# EAGLE board Active_Bandpass_Filter_filter (EAGLE 7.5.0)
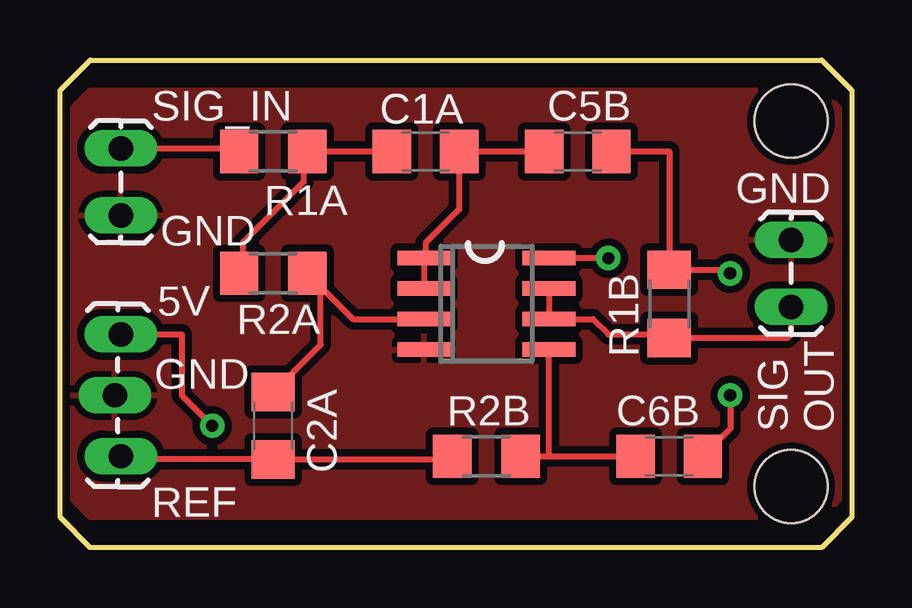
[diagram p0: board, top side]
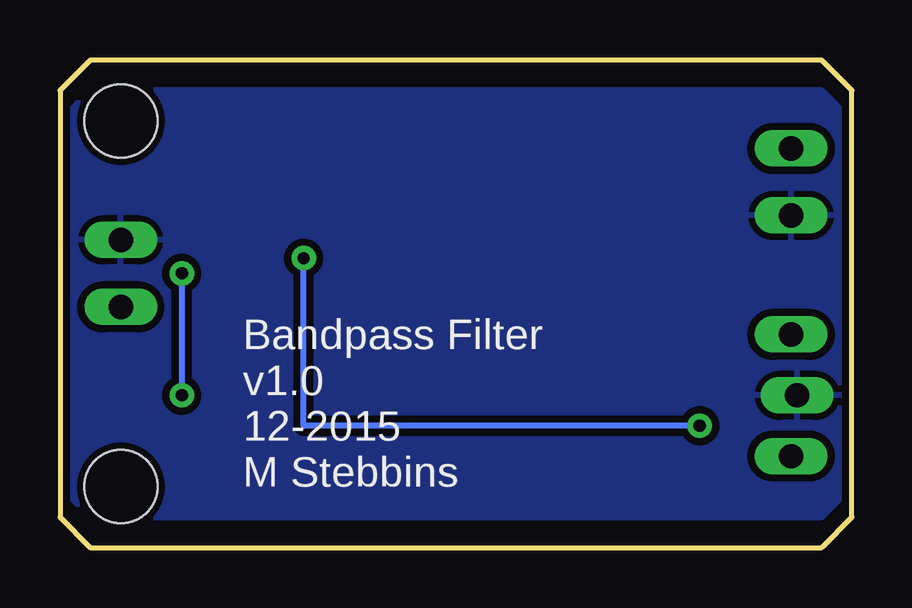
[diagram p1: board, bottom side, seen from below]

Size 33.02 x 20.32 mm. Coordinates in mm from the lower left corner, seen from the top.
Outline: 0,1.27 0,19.05 1.27,20.32 31.75,20.32 33.02,19.05 33.02,1.27 31.75,0 1.27,0 0,1.27
Copper layers (1*16): Top 0.035mm / dielectric 1.5mm / Bottom 0.035mm
Design rules "SparkFun-2-layer-STANDARD": minimum track width 10mil, minimum drill 20mil, track to track 10mil, track to pad 8mil, pad to pad 8mil, via to via 10mil, smd to smd 8mil, copper to edge 8mil, drill to drill 8mil, minimum pad ring 10mil, minimum via ring 10mil, stop-mask expansion 4mil, vias tented up to drill 20mil, thermal gap 10mil
Holes 3.05 mm at 30.48,17.78 30.48,2.54

## Footprints (pad centres in the part's own frame; a part is rotated, then mirrored left to right if it is on the bottom)
C1206 = smd 1.6 x 1.8: 1 -1.4,0; 2 1.4,0
SO8 = smd 0.6 x 2.2: 1 -1.905,-2.6; 2 -0.635,-2.6; 3 0.635,-2.6; 4 1.905,-2.6; 5 1.905,2.6; 6 0.635,2.6; 7 -0.635,2.6; 8 -1.905,2.6
1X02_LOCK_LONGPADS = drill 1.016 long: 1 -0.127,0; 2 2.667,0
1X03_LOCK_LONGPADS = drill 1.016 long: 1 0,0; 2 2.54,-0.254; 3 5.08,0
R1206 = smd 1.6 x 1.803: 1 -1.422,0; 2 1.422,0

## Placement (x,y rotation side)
C1A  3.9nF  [C1206]  15.24,16.51 0 top
C2A  390pF  [C1206]  8.89,5.08 270 top
C5B  68nF  [C1206]  21.59,16.51 0 top
C6B  68nF  [C1206]  25.4,3.81 180 top
IC5  AD8542R  [SO8]  17.78,10.16 270 top
JP1  [1X02_LOCK_LONGPADS]  2.54,13.97 90 top
JP2  [1X02_LOCK_LONGPADS]  30.48,12.7 270 top
JP4  [1X03_LOCK_LONGPADS]  2.54,8.89 270 top
R1A  8.45k  [R1206]  8.89,16.51 0 top
R1B  6.34k  [R1206]  25.4,10.16 270 top
R2A  118k  [R1206]  8.89,11.43 0 top
R2B  15.8k  [R1206]  17.78,3.81 0 top

## Library data of the parts
C1A C2A C5B C6B R1A R1B R2A R2B = resistor
IC5 = analog-devices; MF: ALTERA CORPORATION; MPN: AD8542ARZ-REEL; OC_FARNELL: 1424150; OC_NEWARK: 59K6827
JP1 JP2 JP4 = SparkFun-Connectors

## Nets
5V: IC5.8 JP4.1
GND: IC5.4 JP1.1 JP2.1 JP4.2
N$1: C1A.1 R1A.2 R2A.1
N$2: C2A.1 IC5.3 R2A.2
N$3: C1A.2 C5B.1 IC5.1 IC5.2
N$4: C5B.2 C6B.1 R1B.1
N$5: C6B.2 IC5.5 R2B.2
REF: C2A.2 JP4.3 R2B.1
SIG_IN: JP1.2 R1A.1
SIG_OUT: IC5.6 IC5.7 JP2.2 R1B.2

## Tracks (layer width: path | path; a pad name or v marks a point on that pad's centre or on a via)
5V  (via drill 0.51)
  Top 0.254: v22.86,12.06 IC5.8 | JP4.1 5.08,8.89 5.08,6.35 v6.35,5.08
  Bottom 0.254: v6.35,5.08 22.86,5.08 v22.86,12.06
GND
  pour Top (isolate 0.305): 0,2.54 0,17.78 1.27,19.05 31.75,19.05 33.02,17.78 33.02,2.54 31.75,1.27 1.27,1.27
  pour Bottom (isolate 0.305): 0,2.54 0,17.78 1.27,19.05 31.75,19.05 33.02,17.78 33.02,2.54 31.75,1.27 1.27,1.27
N$1
  Top 0.254: C1A.1 R1A.2 10.16,16.51 10.16,15.24 7.62,12.7 7.62,11.58 R2A.1
N$2
  Top 0.254: R2A.2 10.87,10.87 | C2A.1 10.87,8.46 10.87,10.87 | 10.87,10.87 12.22,9.53 IC5.3
N$3
  Top 0.254: C5B.1 C1A.2 16.64,14.1 15.24,12.7 15.24,12.12 IC5.1 IC5.2
N$4  (via drill 0.51)
  Top 0.254: C5B.2 25.4,16.51 R1B.1 27.94,11.58 v27.94,11.43 | v27.94,6.35 27.94,4.95 C6B.1
  Bottom 0.254: v27.94,11.43 v27.94,6.35
N$5
  Top 0.254: C6B.2 R2B.2 20.38,3.81 IC5.5
REF
  Top 0.254: JP4.3 2.67,3.68 C2A.2 16.23,3.68 R2B.1
SIG_IN
  Top 0.254: JP1.2 7.47,16.64
  Top 0.406: 7.47,16.64 R1A.1
SIG_OUT
  Top 0.254: IC5.7 IC5.6 22.23,9.53 22.86,8.89 25.25,8.89 R1B.2 30.33,8.74 30.48,8.89 JP2.2

## Text on the board
tPlace: SIG_IN | GND | GND | 5V | GND | SIG / OUT | REF
bPlace: Bandpass Filter / v1.0 / 12-2015 / M Stebbins